# Altium PCB ZHL_RF_AMP.pcbdoc (part 2 of 2)
Units mm, origin at the board's own origin, x right, y up, seen from the top; angles counter-clockwise.
Board outline 160 x 100 mm, 2 copper layers (Top Layer, Bottom Layer), stack 1.51 mm thick; 97 components, 32 nets, 298 pads, 97 vias.
Unrouted connection lines stored in the file: 7.
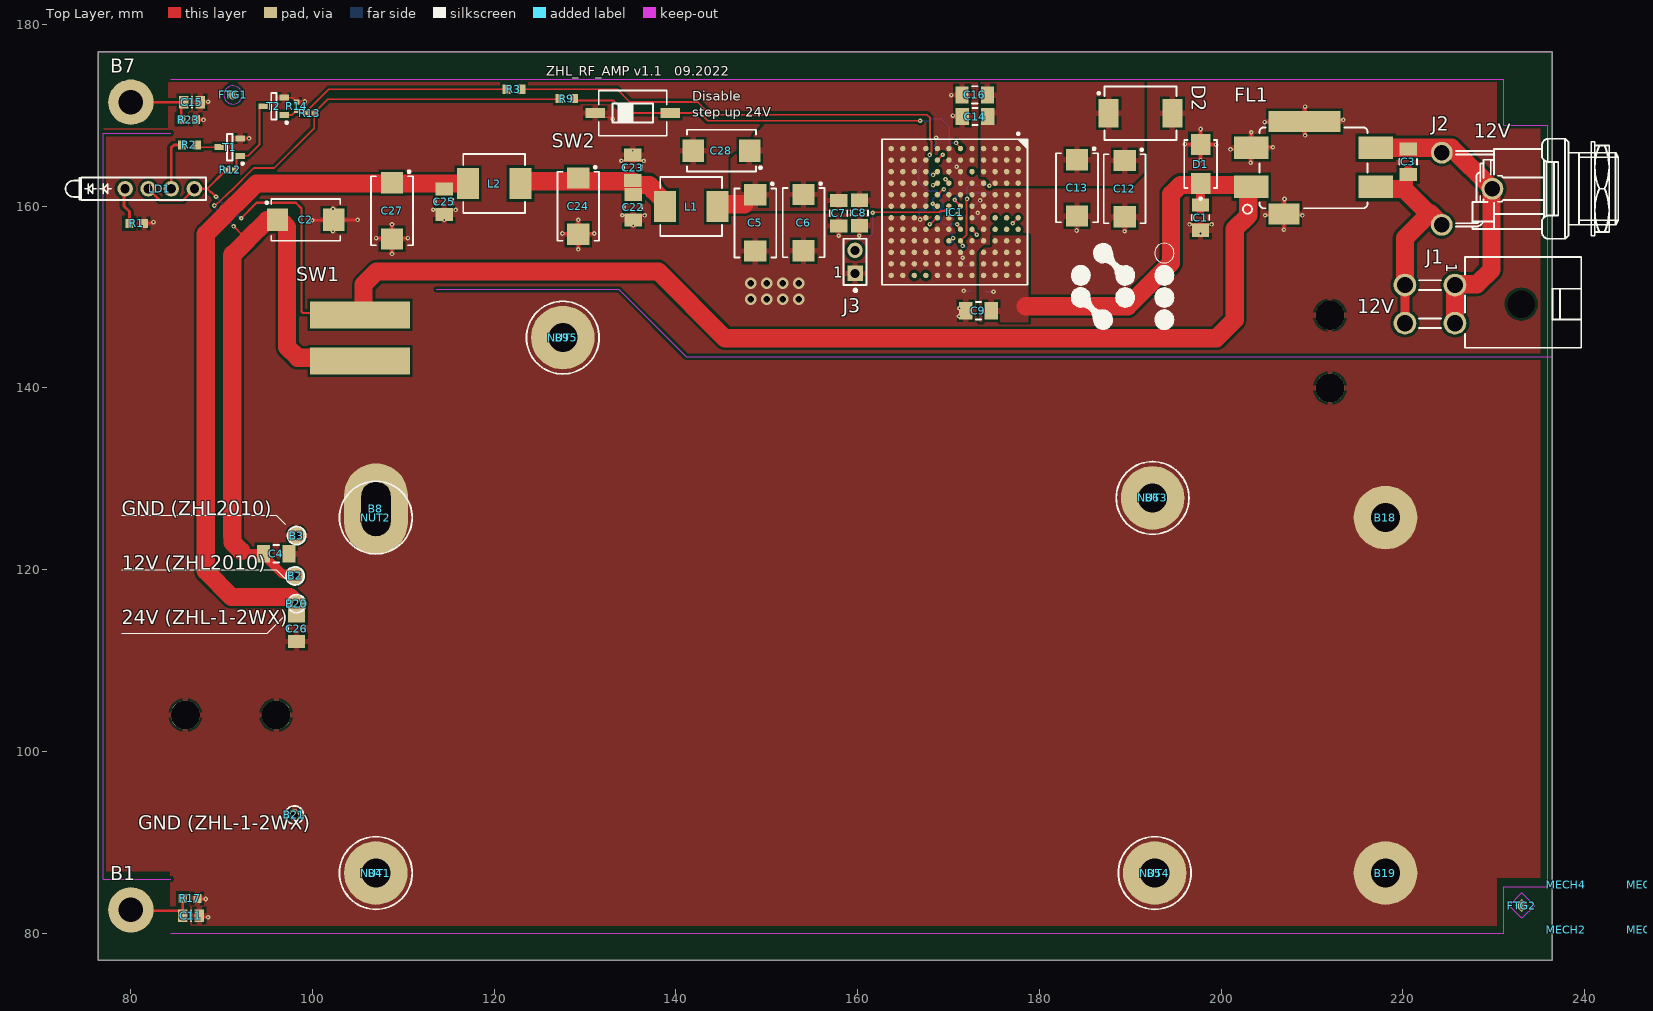
[diagram p0: Top Layer view]

## Via types
v1: diameter 0.5, hole 0.2, Top Layer to Bottom Layer, tented both sides, 89 vias
v2: diameter 1.27, hole 0.711, Top Layer to Bottom Layer, tented both sides, 8 vias

## Nets (pads, with @x,y where several pads share a name; then routed paths per layer and width w, separated by ;. In a path a pad name is that pad's centre, name@x,y a point inside that pad or via, vN(x,y) a via of type N, cw(c..) or ccw(c..) an arc to the next point about the centre after c; other vN are vias at no path point) (continued)
P12V0: (continued)
  Top Layer w0.254: LD1.2 83.202,160.638 85.708,160.638 86.97,161.9 LD1.4@87.173,161.9 ; LD1.4@87.173,161.925 88.425,161.925 ; v1(89.378,161.041) 88.876,161.543 88.807,161.543 88.425,161.925 ; R12.2 90.5,163.98 90.337,163.817 90.317,163.817 88.425,161.925 ; v1(92.155,158.684) 93.846,160.376 98.146,160.376 98.781,159.741 98.781,148.405 98.929,148.256 102.721,148.256 SW1.1@102.895,148.082
  Top Layer w1: D1.1 197.747,162.487 197.747,162.34 197.747,159.653 C1.2@197.75,159.65
  Top Layer w2: SW1.1 105.623,148.413 105.623,151.368 107.061,152.806 138.074,152.806 145.415,145.466 199.466,145.466 201.5,147.5 201.5,157.5 203,159 203,161.88 202.54,162.34 197.747,162.34 195.522,162.34 194.5,161.318 194.5,153.75 189.75,149 178.5,149
  Bottom Layer w0.254: v1(89.378,161.041) 89.39,161.041 91.415,159.017 91.756,159.017 92.088,158.684 v1(92.155,158.684) ; C10.2 v1(174.955,150.597)
P12VRF: B2.1 C2.1 C4.2 R9.1 R13.2 SW1.2 | length 149.1
  Top Layer w0.2: v1(89.196,160.08) 89.277,160.08 89.578,160.381 89.651,160.381 90.924,161.654 90.985,161.654 93.542,164.211 95.783,164.211 100.178,168.605 ; v1(91.313,157.785) 92.32,156.777 ; 100.19,168.644 R13.2 ; R13.2@100.379,170.459 101.7,171.78 127.064,171.78 R9.1@127.191,171.906
  Top Layer w1: 90.65,154.65 90.65,123.6 91.186,123.064 ; 92.177,122.073 92.5,121.75 C4.2 94.6,121.525 94.825,121.3 94.929,121.3 96.731,119.499 97.889,119.499 B2.1
  Top Layer w2: 91.186,154.711 91.186,154.635 ; 92.151,122.047 91.186,123.012 91.186,123.064 91.186,154.635 ; 92.812,156.286 95.025,158.5 C2.1@96.1,158.5 ; 92.824,156.273 91.186,154.635 ; C2.1@96.825,158.09 97.206,157.709 97.206,144.502 98.377,143.33 104.88,143.33 SW1.2
  Bottom Layer w0.2: v1(89.196,160.08) 89.281,159.995 89.281,159.817 v1(91.313,157.785)
P24VRF: B20.1 C25.2 C26.2 C27.1 L2.2 | length 79.8
  Top Layer w2: B20.1 97.5,117 91.096,117 88.25,119.846 88.25,156.928 90.595,159.273 90.595,159.331 91.508,160.244 91.569,160.244 93.825,162.5 108.75,162.5 L2.2
PGOOD: R3.2 R13.1 R14.2 T2.1 | length 25.8
  Top Layer w0.2: T2.1 97.75,170.05 R14.2@98.247,170.547 ; R14.2 98.99,170.53 R13.1@99.188,170.332 ; R13.1@99.263,170.358 99.338,170.358 99.44,170.46 99.44,170.529 101.784,172.872 R3.2
VOUT: C5.1 C6.1 C7.2 C8.2 C28.1 IC1.J1 IC1.J2 IC1.J3 IC1.J4 IC1.J5 IC1.J6 IC1.K1 IC1.K2 IC1.K3 IC1.K4 IC1.K5 IC1.K6 IC1.L1 IC1.L2 IC1.L3 IC1.L4 IC1.L5 IC1.L6 IC1.M1 IC1.M2 IC1.M3 IC1.M4 IC1.M5 IC1.M6 L1.1 | length 3.1
  Top Layer w2: L1.1 144.581,160.019 144.781,160.219 C5.1@147.531,160.219
pads on no net: FTG1.FTG2 FTG2.1 FTG3.FTG2 FTG4.1 IC1.A8 IC1.B7 IC1.B8 IC1.C7 IC1.C8 IC1.E3 IC1.J12 IC1.K12 J1.5

## Polygon pours and split planes (outlines as drawn)
GND on Bottom Layer "NONET_L-01_P-001" (solid, remove dead copper, pour order 0): 76.5,177 236.5,177 236.5,77 76.5,77
VOUT on Top Layer "tgr" (solid, remove dead copper, pour order 1): 167.8,167.5 167.8,159.5 146.3,159.5 146.05,159.75 146.05,165.25 150.05,169.25 167.8,169.25
BVIN on Top Layer "BVIN_L01_P002" (solid, pour order 2): 174.55,162.25 174.55,162.75 174.05,163.25 173.55,163.25 173.55,173.75 191.55,173.75 191.55,163.75 190.05,162.25
GND on Top Layer "GND_L01_P003" (solid, pour order 3): 171.8,158.25 171.8,160.5 169.55,160.5 169.3,160.75 169.3,165.75 168.05,165.75 168.05,173.75 173.05,173.75 173.05,163.75 175.05,161.75 191.55,161.75 191.55,158.25 174.55,158.25 174.55,155.75 173.55,155.75 173.05,155.25 173.05,147.25 148.05,147.25 146.55,148.75 146.55,157.95 147.85,159.25 167.55,159.25 167.59,159.29 168.02,159.29 168.02,158.28 168.05,158.25 169.05,158.25 169.05,159.25 170.435,159.25 170.525,159.34 170.525,157.125 169.925,157.125 169.55,156.75 169.6,156.7 169.6,155.77 169.87,155.5 170.22,155.5 171.8,155.5 171.8,156.75 173.05,156.75 173.05,158.25
P12V0 on Top Layer "P12V0_L01_P004" (solid, pour order 4): 173.3,147.25 173.3,154.75 174.8,156.25 174.8,156.75 178.8,156.75 178.8,147.25
GND on Top Layer "NONET_L-01_P-001" (solid, remove dead copper, pour order 5): 76.858,168.57 84.108,168.57 84.108,174.32 230.358,174.32 230.358,169.07 235.108,169.07 235.108,86.07 230.358,86.07 230.358,80.82 84.358,80.82 84.358,86.82 76.858,86.82 76.858,165.32
no net on Bottom Solder "NONET_L-01_P-001" (solid): 236.398,143.408 141.199,143.408 133.706,150.901 94.285,150.901 92.481,149.098 92.481,80.061 92.532,80.01 236.499,80.01

## Keep-outs
Top Layer:
  lines w0.1: 113.64,150.851 133.731,150.851 141.148,143.434 ; 141.122,143.459 141.148,143.434 ; 236.449,143.434 141.148,143.434
Bottom Layer:
  lines w0.1: 113.64,150.851 133.731,150.851 141.148,143.434 236.423,143.434
  lines w0.127: 84.4,80 84.4,85.95 ; 84.4,168.05 84.4,174
Keep-Out Layer:
  lines w0.127: 84.4,80 231.14,80 231.14,85.09 235.94,85.09 235.94,168.91 231.14,168.91 231.14,174 84.4,174 ; 84.4,85.95 76.94,85.95 76.94,168.05 84.4,168.05 ; 76.44,77 236.44,77 236.44,177 76.44,177 76.44,77

## Other copper
Top Layer:
  text ".Layer_Name" at 144.78,66.04 h1.91
  text "1" at 155.575,52.07 h2.54
Bottom Layer:
  text ".Layer_Name" at 182.88,66.04 h1.91
  text "2" at 160.655,52.07 h2.54

## Silkscreen, mask and mechanical layers (free items; w line width, h text height)
Top Overlay:
  circle w0.013: c193.756,154.837 r1.074
  circle w0.013: c189.449,149.952 r1.071
  circle w0.013: c184.56,152.389 r1.073
  circle w0.013: c193.756,152.382 r1.077
  circle w0.013: c193.759,149.95 r1.074
  circle w0.013: c193.757,147.51 r1.073
  region: 188.079,154.765 188.081,154.764 188.081,154.605 188.079,154.765 188.079,154.607 188.106,154.427 188.157,154.249 188.233,154.071 188.36,153.894 188.512,153.741 188.614,153.665 188.868,153.538 189.046,153.487 189.198,153.462 189.3,153.462 188.385,152.497 188.335,152.903 188.182,153.233 188.004,153.436 187.801,153.589 187.598,153.69 187.395,153.741 187.141,153.767 187.065,153.944
  region: 185.617,149.83 185.642,149.576 185.693,149.398 185.795,149.169 185.896,149.042 185.972,148.941 186.125,148.814 186.252,148.737 186.455,148.636 186.658,148.585 186.938,148.56 185.947,147.518 185.947,147.747 185.896,148.001 185.769,148.28 185.642,148.458 185.515,148.585 185.337,148.712 185.134,148.814 184.956,148.864 184.601,148.915 184.626,149.068
  lines w0.013: 184.617,148.894 cw(c184.689,147.644) 185.94,147.573 ccw(c187.007,147.513) 186.937,148.579 cw(c186.856,149.812) 185.623,149.893 ccw(c184.555,149.963) 184.617,148.894 ; 187.081,153.765 cw(c187.162,152.543) 188.384,152.461 ccw(c189.454,152.389) 189.385,153.459 cw(c189.306,154.686) 188.079,154.765 ccw(c187.01,154.834) 187.081,153.765
  lines w0.1: 79,113 95,113 97,115 ; 79,120 96,120 97,119 ; 79,126 96,126 97,125
  lines w1.15: 184.555,149.463 ccw(c184.555,149.963) 184.555,149.463 ; 184.56,151.889 ccw(c184.56,152.389) 184.559,151.889 ; 187.01,147.013 ccw(c187.01,147.513) 187.01,147.013 ; 187.01,154.334 ccw(c187.01,154.834) 187.01,154.334 ; 189.449,149.452 ccw(c189.449,149.952) 189.448,149.452 ; 189.454,151.889 ccw(c189.454,152.389) 189.454,151.889 ; 193.756,151.882 ccw(c193.756,152.382) 193.756,151.882 ; 193.757,147.01 ccw(c193.757,147.51) 193.757,147.01 ; 193.759,149.45 ccw(c193.759,149.95) 193.758,149.45
  text "ZHL_RF_AMP v1.1   09.2022" at 125.75,174 h1.78
  text "Disable / step up 24V" at 141.783,169.469 h1.78
  text "12V" at 227.838,167.513 h1.52
  text "12V" at 215.011,148.234 h1.52
  text "GND (ZHL2010)" at 79,126 h1.52
  text "12V (ZHL2010)" at 79,120 h1.52
  text "24V (ZHL-1-2WX)" at 79,114 h1.52
  text "GND (ZHL-1-2WX)" at 80.813,91.372 h1.52
  text ".Layer_Name" at 144.78,63.5 h1.91
Bottom Overlay:
  circle w0.013: c198.598,155.041 r1.074
  circle w0.013: c202.905,150.155 r1.071
  circle w0.013: c207.794,152.593 r1.073
  circle w0.013: c198.598,152.585 r1.077
  circle w0.013: c198.595,150.153 r1.074
  circle w0.013: c198.596,147.713 r1.073
  region: 204.275,154.968 204.273,154.967 204.273,154.808 204.275,154.968 204.275,154.81 204.248,154.63 204.197,154.452 204.121,154.275 203.994,154.097 203.841,153.944 203.74,153.868 203.486,153.741 203.308,153.69 203.156,153.665 203.054,153.665 203.968,152.7 204.019,153.106 204.172,153.436 204.349,153.64 204.553,153.792 204.756,153.894 204.959,153.944 205.213,153.97 205.289,154.148
  region: 206.737,150.033 206.712,149.779 206.661,149.601 206.559,149.372 206.458,149.245 206.381,149.144 206.229,149.017 206.102,148.941 205.899,148.839 205.696,148.788 205.416,148.763 206.407,147.721 206.407,147.95 206.458,148.204 206.585,148.483 206.712,148.661 206.839,148.788 207.016,148.915 207.22,149.017 207.397,149.068 207.753,149.118 207.728,149.271
  lines w0.013: 202.969,153.662 ccw(c203.048,154.889) 204.275,154.968 cw(c205.344,155.037) 205.273,153.968 ccw(c205.192,152.746) 203.969,152.664 cw(c202.9,152.592) 202.969,153.662 ; 205.417,148.782 ccw(c205.498,150.015) 206.731,150.096 cw(c207.799,150.166) 207.737,149.097 ccw(c207.665,147.847) 206.414,147.776 cw(c205.347,147.716) 205.417,148.782
  lines w1.15: 198.595,149.653 ccw(c198.595,150.153) 198.595,149.653 ; 198.597,147.213 ccw(c198.596,147.713) 198.596,147.213 ; 198.598,152.085 ccw(c198.598,152.585) 198.598,152.085 ; 202.9,152.092 ccw(c202.9,152.592) 202.9,152.092 ; 202.906,149.655 ccw(c202.905,150.155) 202.905,149.655 ; 205.344,147.216 ccw(c205.344,147.716) 205.344,147.216 ; 205.344,154.537 ccw(c205.344,155.037) 205.344,154.537 ; 207.795,152.093 ccw(c207.794,152.593) 207.794,152.093 ; 207.799,149.666 ccw(c207.799,150.166) 207.799,149.666
  text ".Layer_Name" at 182.88,63.5 h1.91
Top Paste:
  text ".Layer_Name" at 144.78,58.42 h1.91
Bottom Paste:
  text ".Layer_Name" at 182.88,58.42 h1.91
Top Solder:
  rectangle: 99.924,80.25 235.25,139.471
  text ".Layer_Name" at 144.78,60.96 h1.91
Bottom Solder:
  pour cut-out: 95.758,125.755 99.924,125.755 100.406,125.273 100.406,115.037 99.847,114.478 95.936,114.478 95.377,115.037 95.377,125.374
  text ".Layer_Name" at 182.88,60.96 h1.91
Mechanical 1:
  the board outline again, w1.27
Mechanical 3:
  circle w0.127: c80.01,171.45 r2.25
  circle w0.127: c80.01,82.55 r2.25
  lines w0.127: 55.4,74.25 54.4,74.25 54.4,72.25 71.4,72.25 ; 55.4,84.95 54.4,84.95 54.4,86.95 57.49,86.95 62.906,83.45 ccw(c65.619,87.65) 65.619,82.65 71.4,82.65 ; 56.4,74.25 69,74.25 69,80.65 63.555,80.65 56.9,84.95 56.4,84.95 ; 61.4,63.25 68.6,63.25 ; 61.4,63.75 68.6,63.75 ; 61.4,64.25 68.6,64.25 ; 61.4,64.75 68.6,64.75 ; 61.4,65.25 68.6,65.25 ; 61.4,65.75 68.6,65.75 ; 61.4,66.25 68.6,66.25 ; 61.4,66.75 68.6,66.75 ; 61.4,67.25 68.6,67.25 ; 61.4,67.75 68.6,67.75 ; 61.4,68.25 68.6,68.25 ; 61.4,185.75 68.6,185.75 ; 61.4,186.25 68.6,186.25 ; 61.4,186.75 68.6,186.75 ; 61.4,187.25 68.6,187.25 ; 61.4,187.75 68.6,187.75 ; 61.4,188.25 68.6,188.25 ; 61.4,188.75 68.6,188.75 ; 61.4,189.25 68.6,189.25 ; 61.4,189.75 68.6,189.75 ; 61.4,190.25 68.6,190.25 ; 61.4,190.75 68.6,190.75 ; 73.9,64.75 80.6,64.75 81.6,65.75 80.6,66.75 73.9,66.75 ; 73.9,74.45 83.9,74.45 83.9,85.45 73.9,85.45 ; 73.9,187.25 80.6,187.25 81.6,188.25 80.6,189.25 73.9,189.25 ; 76.44,74.45 76.44,85.45 ; 76.44,168.55 76.44,179.55 ; 78.105,81.352 81.208,84.455 ; 78.105,170.252 81.208,173.355 ; 78.812,80.645 81.915,83.748 ; 78.812,169.545 81.915,172.648 ; 61.4,62.75 60.6,63.55 60.6,67.95 61.4,68.75 ; 61.4,62.75 61.4,68.75 ; 61.4,62.75 68.6,62.75 ; 61.4,68.75 68.6,68.75 ; 61.4,185.25 60.6,186.05 60.6,190.45 61.4,191.25 ; 61.4,185.25 61.4,191.25 ; 61.4,185.25 68.6,185.25 ; 61.4,191.25 68.6,191.25 ; 68.6,62.75 71.4,62.75 71.4,68.75 68.6,68.75 ; 68.6,62.75 68.6,68.75 ; 68.6,185.25 71.4,185.25 71.4,191.25 68.6,191.25 ; 68.6,185.25 68.6,191.25 ; 55.4,73.3 56.4,73.3 56.4,85.9 55.4,85.9 55.4,73.3 ; 67.4,75.7 ccw(c67.9,75.7) 67.9,75.2 69,75.2 69,79.7 67.9,79.7 ccw(c67.9,79.2) 67.4,79.2 67.4,77.85 68.2,77.85 68.2,77.05 67.4,77.05 67.4,75.7 ; 71.4,62.65 73.9,62.65 73.9,191.35 71.4,191.35 71.4,62.65 ; 73.9,168.55 83.9,168.55 83.9,179.55 73.9,179.55 73.9,168.55
Corners:
  lines w0.254: 71.44,77 76.44,77 76.44,72 ; 71.44,177 76.44,177 76.44,182 ; 158.75,50.8 158.75,55.88 ; 236.44,72 236.44,77 241.44,77 ; 236.44,182 236.44,177 241.44,177 ; 153.67,50.8 163.83,50.8 163.83,55.88 153.67,55.88 153.67,50.8
Title Block:
  circle w0.305: c88.265,63.5 r3.81
  lines w0.254: 86.36,62.238 ccw(c90.805,62.23) 87.073,64.644 ; 95.25,62.23 95.25,66.675 ; 97.79,59.055 139.7,59.055 ; 97.79,62.23 139.7,62.23 ; 97.79,65.405 139.7,65.405 ; 111.76,55.88 111.76,68.58 ; 83.82,55.88 96.52,55.88 96.52,68.58 83.82,68.58 83.82,55.88 ; 97.79,55.88 139.7,55.88 139.7,68.58 97.79,68.58 97.79,55.88
  lines w0.305: 84.709,62.128 85.725,59.055 ; 87.757,56.007 90.83,60.681 ; 88.265,67.31 95.885,67.945 ; 91.999,64.262 94.615,55.88
  text "Number" at 99.06,66.04 h1.91
  text "EDA-0XXXX-V1" at 113.03,66.04 h1.91
  text "Drawn By" at 99.06,62.865 h1.91
  text "CEGELEC XXX" at 113.03,62.865 h1.91
  text "CERN" at 85.09,62.611 h2.54
  text "DATE" at 99.06,59.69 h1.91
  text "XX-XX-XXXX" at 113.03,59.69 h1.91
  text "MOD." at 99.06,56.515 h1.91
  text "-" at 113.03,56.515 h1.91
  text "Print Date" at 99.06,53.34 h1.27
  text ".Print_Date" at 114.3,53.34 h1.27
  text ".Print_Time" at 127,53.34 h1.27
  text ".Print_Scale" at 99.06,50.8 h1.27
Notvisible:
  circle w0.127: c80.01,171.45 r1.35
  circle w0.127: c80.01,82.55 r1.35
  circle w0.127: c145.44,127.5 r0.5
  circle w0.127: c233.68,82.55 r1.35
  circle w0.127: c233.68,171.45 r1.35
  lines w0.025: 75.805,77 77.075,77 ; 76.44,76.365 76.44,77.635
  lines w0.127: 76.44,77 156.44,127 ; 76.44,79.5 236.44,79.5 ; 76.44,127 156.44,127 ; 76.44,174.5 236.44,174.5 ; 76.44,177 156.44,127 ; 79.055,81.595 80.01,82.55 80.965,81.595 ; 79.055,170.495 80.01,171.45 80.965,170.495 ; 156.44,77 156.44,127 ; 156.44,177 156.44,127 ; 233.68,81.3 233.68,82.55 234.93,82.55 ; 233.68,170.2 233.68,171.45 234.93,171.45 ; 236.44,77 156.44,127 ; 236.44,127 156.44,127 ; 236.44,177 156.44,127 ; 81.44,78 81.44,79.5 235.94,79.5 235.94,78 81.44,78 ; 81.44,174.5 81.44,176 235.94,176 235.94,174.5 81.44,174.5
  text "76.44,77 (mm)" at 77.075,77 h1.52
Mechanical 14:
  lines w0.1: 106.969,86.61 106.969,145.781 ; 107,127.89 112.61,127.89 ; 215.11,86.61 218.099,86.61 ; 215.11,125.73 218.099,125.73 ; 218.099,80.099 218.099,86.61 ; 218.099,90.849 218.099,86.61 ; 218.099,119.219 218.099,125.73 ; 218.099,129.969 218.099,125.73 ; 221.89,86.61 218.099,86.61 ; 221.89,125.73 218.099,125.73
Drill Drawing:
  text ".LEGEND" at 101.6,187.96 h2
  text "Components" at 205.74,66.04 h1.91
  text ".Component_Count" at 223.52,66.04 h1.91
  text "Pins" at 205.74,63.5 h1.91
  text ".Pad_Count" at 223.52,63.5 h1.91
  text "Vias" at 205.74,60.96 h1.91
  text ".Via_Count" at 223.52,60.96 h1.91
  text "Holes" at 205.74,58.42 h1.91
  text ".Hole_Count" at 223.52,58.42 h1.91
  text "Nets" at 205.74,55.88 h1.91
  text ".Net_Count" at 223.52,55.88 h1.91

## Dimensions
236.44,77 to 236.44,177 on Drill Drawing
76.44,177 to 236.44,177 on Drill Drawing

## Text inside footprints (layer, text, board x,y; h text height)
J1: Top Overlay "1" at 224.795,153.7 h1.2 r270; Mechanical 14 "1" at 224.795,153.7 h1.2 r270
J2: Notvisible "2.5mm" at 239.87,158.625 h1 r90; Notvisible "SLEEVE SHUNT" at 230.895,166.15 h0.5 r180; Notvisible "CENTER PIN" at 229.795,158.225 h0.5 r180
J3: Top Overlay "1" at 157.343,152.105 h1.2
SW1: Drill Drawing "r0.6" at 113.142,143.637 h1 r270; Drill Drawing "19.5mm" at 119.771,149.779 h1; Drill Drawing "12.5mm" at 117.085,144.658 h1 r270
SW2: Mechanical 14 "ON" at 137.79,171.139 h1 r270